# EAGLE board ODGIRON_steel_0412 (EAGLE 9.6.0), part 1 of 2
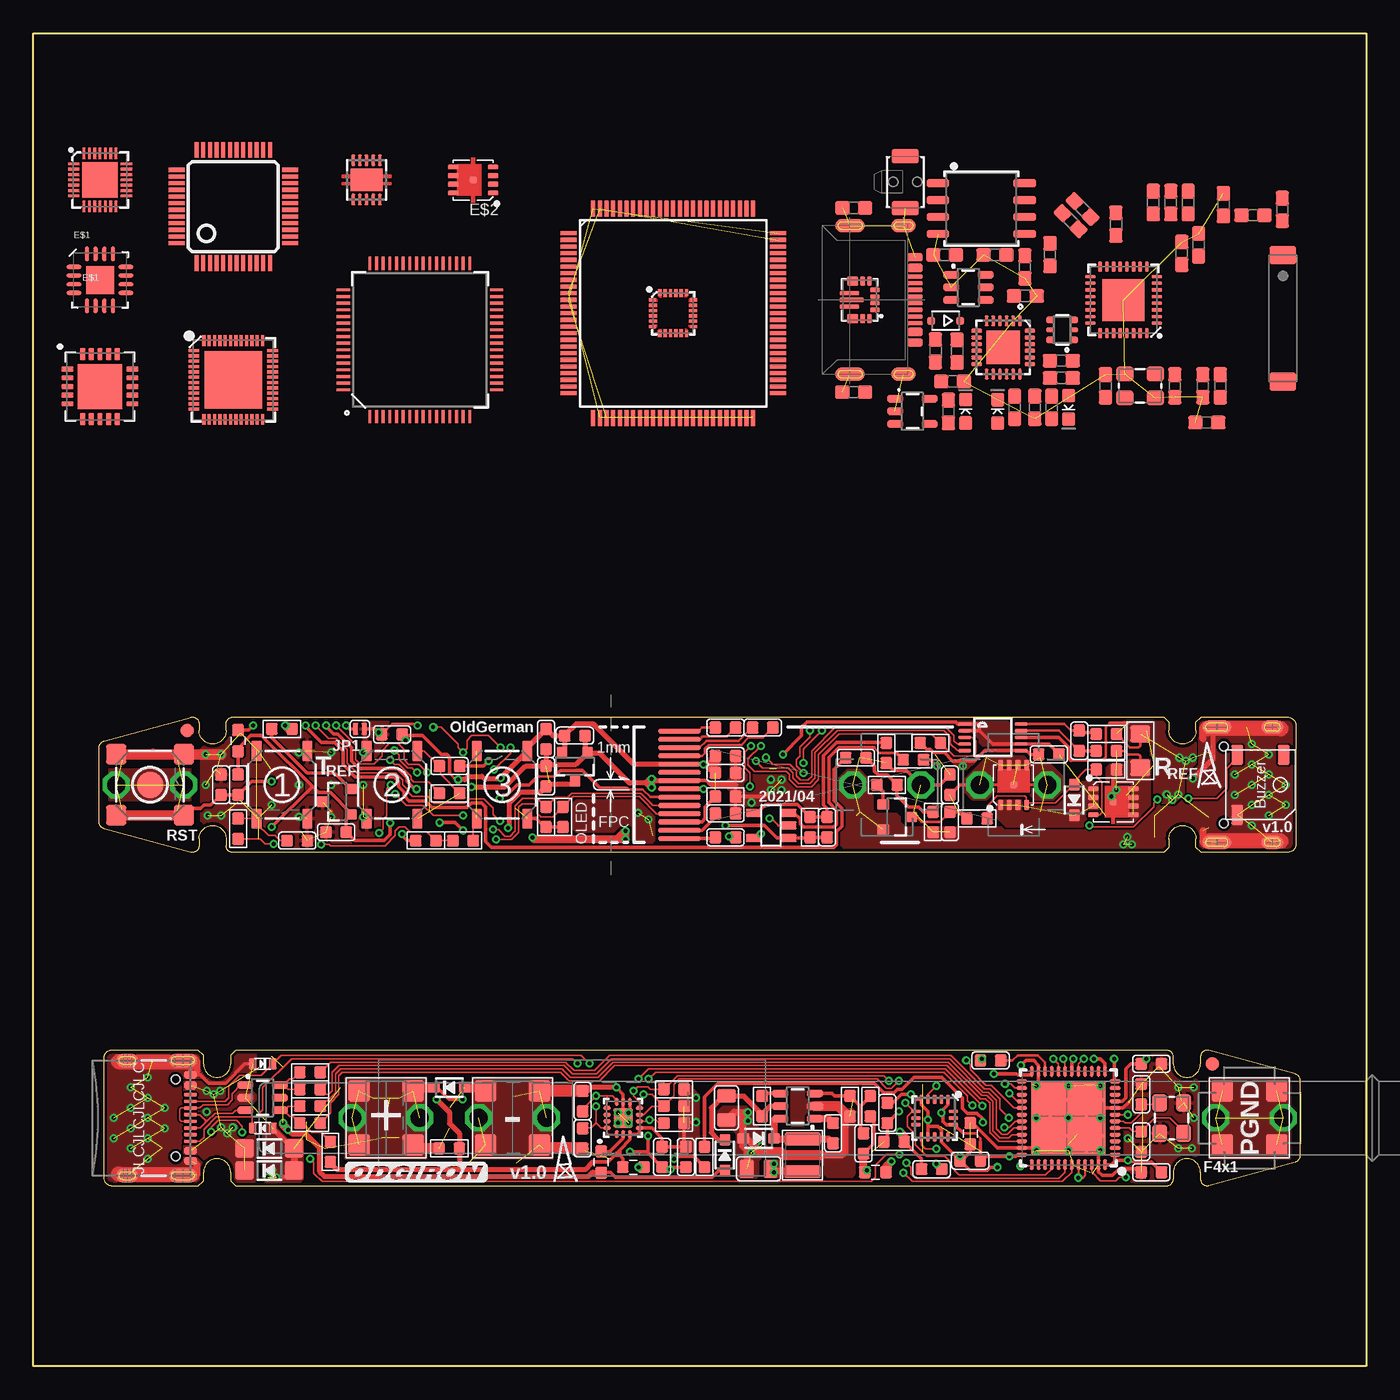
[diagram p0: board, top side]
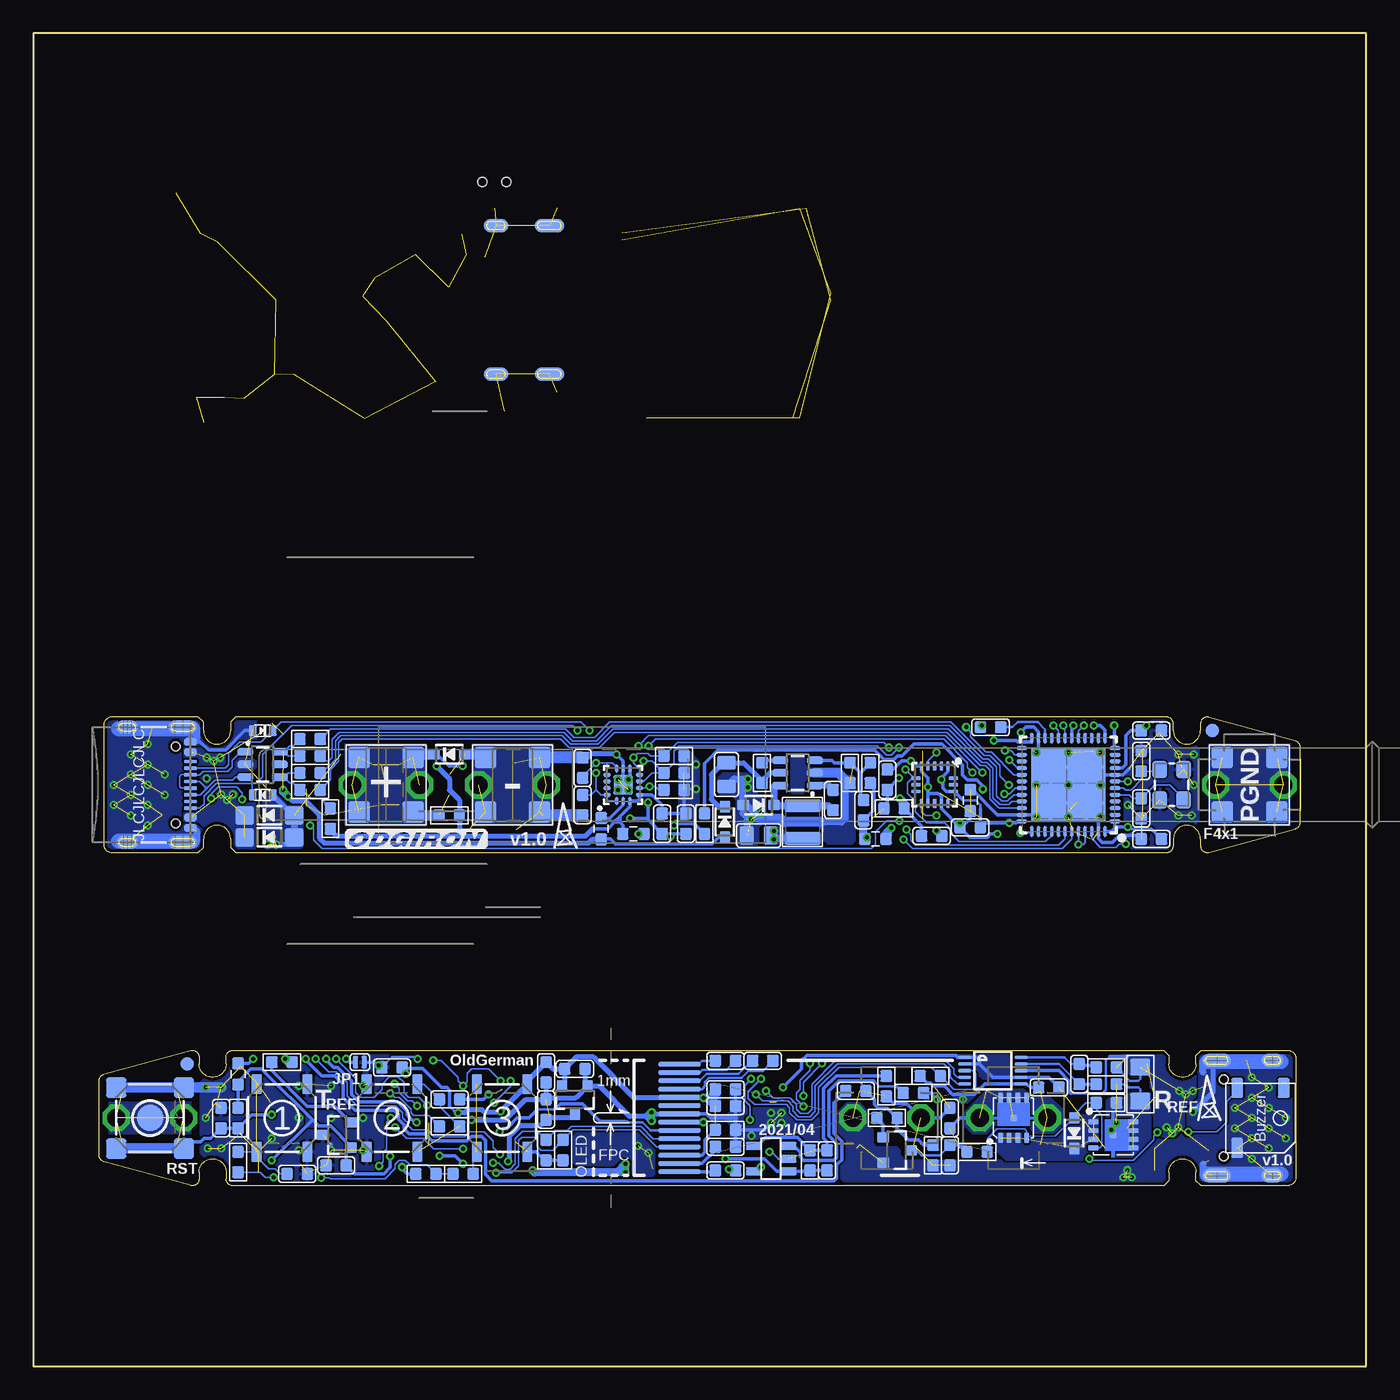
[diagram p1: board, bottom side, seen from below]

Size 100 x 100 mm. Coordinates in mm from the lower left corner, seen from the top.
Outline: 100,0 0,0 0,100 100,100 100,0
Outline: 14.79,23.32 14.79,22.68 arc-180 12.76,22.68 12.76,23.32 12.38,23.7 5.91,23.7 arc90 5.27,23.07 5.27,14.18 arc90 5.91,13.54 12.38,13.54 12.76,13.92 12.76,14.56 arc-180 14.79,14.56 14.79,13.92 15.18,13.54 85.03,13.54 arc90 85.53,14.05 85.53,14.56 arc-180 87.57,14.56 87.57,14.05 arc105 88.21,13.56 94.68,15.32 arc75 95.06,15.83 95.06,21.41 arc75 94.68,21.92 88.21,23.68 arc105 87.57,23.19 87.57,22.68 arc-180 85.53,22.68 85.53,23.19 arc90 85.03,23.7 15.18,23.7 14.79,23.32
Outline: 85.2,48.32 85.2,47.68 arc180 87.24,47.68 87.24,48.32 87.62,48.7 94.09,48.7 arc-90 94.73,48.06 94.73,39.17 arc-90 94.09,38.54 87.62,38.54 87.24,38.92 87.24,39.56 arc180 85.2,39.56 85.2,38.92 84.82,38.54 14.97,38.54 arc-90 14.47,39.05 14.47,39.56 arc180 12.43,39.56 12.43,39.05 arc-105 11.79,38.56 5.32,40.32 arc-75 4.94,40.83 4.94,46.41 arc-75 5.32,46.92 11.79,48.68 arc-105 12.43,48.19 12.43,47.68 arc180 14.47,47.68 14.47,48.19 arc-90 14.97,48.7 84.82,48.7 85.2,48.32
Copper layers (1*16): Top 0.035mm / dielectric 1.5mm / Bottom 0.035mm
Design rules "default *": minimum track width 5mil, minimum drill 0.3mm, track to track 5mil, track to pad 6mil, pad to pad 6mil, via to via 6mil, smd to smd 5mil, copper to edge 10mil, drill to drill 10mil, minimum pad ring 10mil, minimum via ring 6mil, stop-mask expansion 1mil, vias tented up to drill 20mil, thermal gap 8mil
tRestrict: 12 lines
bRestrict: 12 lines

## Footprints (pad centres in the part's own frame; a part is rotated, then mirrored left to right if it is on the bottom)
SOT23-5 = smd 0.6 x 1.2: 1 -0.95,-1.306; 2 0,-1.306; 3 0.95,-1.306; 4 0.95,1.306; 5 -0.95,1.306
BUZZER_5020 = smd 1.5 x 0.9: + -2.25,-1.75; - 2.25,-1.75; NC -2.25,1.75
C0603 = smd 0.889 x 0.889: 1 -0.762,0; 2 0.762,0
C0805 = smd 1.016 x 1.397: 1 -0.889,0; 2 0.889,0
0603 = smd 1.1 x 1: 1 -0.85,0; 2 0.85,0
FUSE_CLIPS_01 = drill 1.35 pad 2 octagon: 1A -2.54,0; 1B 2.54,0
SOD-323 = smd 0.9 x 0.8: A 1.15,0; C -1.15,0
SOD-123 = smd 1.4 x 1.4: A 1.85,0; C -1.85,0
SOD-523 = smd 0.8 x 0.6: A 0,-0.75; K 0,0.75
LED-0603 = smd 1 x 1: A -0.877,0; C 0.877,0
SOD323-R = smd 0.6 x 0.6: A 1.1,0; C -1.1,0
MSOP10 = smd 0.25 x 1: 1 -1,-2.113; 2 -0.5,-2.113; 3 0,-2.113; 4 0.5,-2.113; 5 1,-2.113; 6 1,2.113; 7 0.5,2.113; 8 0,2.113; 9 -0.5,2.113; 10 -1,2.113
HVQFN16_4X4_0.65MM = smd 1.1 x 0.3: 1 -1.95,0.975; 2 -1.95,0.325; 3 -1.95,-0.325; 4 -1.95,-0.975; 9 1.95,-0.975; 10 1.95,-0.325; 11 1.95,0.325; 12 1.95,0.975 | smd 0.3 x 1.1: 5 -0.975,-1.95; 6 -0.325,-1.95; 7 0.325,-1.95; 8 0.975,-1.95; 13 0.975,1.95; 14 0.325,1.95; 15 -0.325,1.95; 16 -0.975,1.95 | smd 2.1 x 2.1: PAD 0,0
DFN8P-0.65-3X3X0.8MM = smd 0.8 x 0.4: 1 -1.5,0.975; 2 -1.5,0.325; 3 -1.5,-0.325; 4 -1.5,-0.975; 5 1.5,-0.975; 6 1.5,-0.325; 7 1.5,0.325; 8 1.5,0.975 | smd 0.508 x 0.508: 9 0,0
F0603 = smd 0.889 x 0.889: 1 -0.8,0; 2 0.8,0
FIDUCIAL_1MM = smd 1 x 1: 1 0,0
DRC-S-PVSON-N10 = smd 0.28 x 0.85: 1 -1,-1.475; 2 -0.5,-1.475; 3 0,-1.475; 4 0.5,-1.475; 5 1,-1.475; 6 1,1.475; 7 0.5,1.475; 8 0,1.475; 9 -0.5,1.475; 10 -1,1.475 | smd 2.4 x 1.65: TH 0,0
LQFP100_14X14 = smd 1.2 x 0.3: 1 -7.85,6; 2 -7.85,5.5; 3 -7.85,5; 4 -7.85,4.5; 5 -7.85,4; 6 -7.85,3.5; 7 -7.85,3; 8 -7.85,2.5; 9 -7.85,2; 10 -7.85,1.5; 11 -7.85,1; 12 -7.85,0.5; 13 -7.85,0; 14 -7.85,-0.5; 15 -7.85,-1; 16 -7.85,-1.5; 17 -7.85,-2; 18 -7.85,-2.5; 19 -7.85,-3; 20 -7.85,-3.5; 21 -7.85,-4; 22 -7.85,-4.5; 23 -7.85,-5; 24 -7.85,-5.5; 25 -7.85,-6; 51 7.85,-6; 52 7.85,-5.5; 53 7.85,-5; 54 7.85,-4.5; 55 7.85,-4; 56 7.85,-3.5; 57 7.85,-3; 58 7.85,-2.5; 59 7.85,-2; 60 7.85,-1.5; 61 7.85,-1; 62 7.85,-0.5; 63 7.85,0; 64 7.85,0.5; 65 7.85,1; 66 7.85,1.5; 67 7.85,2; 68 7.85,2.5; 69 7.85,3; 70 7.85,3.5; 71 7.85,4; 72 7.85,4.5; 73 7.85,5; 74 7.85,5.5; 75 7.85,6 | smd 0.3 x 1.2: 26 -6,-7.85; 27 -5.5,-7.85; 28 -5,-7.85; 29 -4.5,-7.85; 30 -4,-7.85; 31 -3.5,-7.85; 32 -3,-7.85; 33 -2.5,-7.85; 34 -2,-7.85; 35 -1.5,-7.85; 36 -1,-7.85; 37 -0.5,-7.85; 38 0,-7.85; 39 0.5,-7.85; 40 1,-7.85; 41 1.5,-7.85; 42 2,-7.85; 43 2.5,-7.85; 44 3,-7.85; 45 3.5,-7.85; 46 4,-7.85; 47 4.5,-7.85; 48 5,-7.85; 49 5.5,-7.85; 50 6,-7.85; 76 6,7.85; 77 5.5,7.85; 78 5,7.85; 79 4.5,7.85; 80 4,7.85; 81 3.5,7.85; 82 3,7.85; 83 2.5,7.85; 84 2,7.85; 85 1.5,7.85; 86 1,7.85; 87 0.5,7.85; 88 0,7.85; 89 -0.5,7.85; 90 -1,7.85; 91 -1.5,7.85; 92 -2,7.85; 93 -2.5,7.85; 94 -3,7.85; 95 -3.5,7.85; 96 -4,7.85; 97 -4.5,7.85; 98 -5,7.85; 99 -5.5,7.85; 100 -6,7.85
USB-C-16P = smd 0.28 x 1: A5 -1.25,-0.34; A6 -0.25,-0.34; A7 0.25,-0.34; A8 1.25,-0.34; B5 1.75,-0.34; B6 0.75,-0.34; B7 -0.75,-0.34; B8 -1.75,-0.34 | smd 0.56 x 1: GND -3.225,-0.34; GND2 3.225,-0.34; VBUS1 -2.45,-0.34; VBUS2 2.45,-0.34 | smd 1 x 2.1: SHLD1 -4.32,-0.915; SHLD2 4.32,-0.915 | smd 1 x 2.1 bottom: SHLD3 -4.32,-0.915; SHLD4 4.32,-0.915 | smd 1 x 1.6: SHLD5 -4.32,-5.095; SHLD8 4.32,-5.095 | smd 1 x 1.6 bottom: SHLD6 -4.32,-5.095; SHLD7 4.32,-5.095 | hole 0.65: -2.89,-1.445; 2.89,-1.445
SMT-JUMPER_2_NO_SILK = smd 0.406 x 0.889: 1 -0.33,0; 2 0.33,0
SMD,3.2X2.5X2.5MM = smd 0.95 x 2.7: 1 1.225,0; 2 -1.225,0
0.87INCH_128X32_OLED_SSD1306 = smd 3.2 x 0.35: 1 -2.888,-4.03; 2 -2.888,-3.41; 3 -2.888,-2.79; 4 -2.888,-2.17; 5 -2.888,-1.55; 6 -2.888,-0.93; 7 -2.888,-0.31; 8 -2.888,0.31; 9 -2.888,0.93; 10 -2.888,1.55; 11 -2.888,2.17; 12 -2.888,2.79; 13 -2.888,3.41; 14 -2.888,4.03
TP16SQ = smd 1.6 x 1.6: TP 0,0
SOT23-3 = smd 0.8 x 0.9: 1 -0.95,-1; 2 0.95,-1; 3 0,1.1
R0603 = smd 0.889 x 0.889: 1 -0.762,0; 2 0.762,0
R1206 = smd 1.27 x 1.524: 1 -1.27,0; 2 1.27,0
TACTILE_SWITCH_SMD = smd 1.524 x 0.762: 1 -2.54,1.905; 2 2.54,1.905; 3 -2.54,-1.905; 4 2.54,-1.905
TACTILE_SWITCH_SMD' = smd 1.524 x 1.524: 1 -2.54,2.286; 2 2.54,2.286; 3 -2.54,-2.286; 4 2.54,-2.286
TACTILE_SWITCH_SMD_RIGHT_ANGLE = smd 1.1 x 2: 1 -1.95,0; 2 1.95,0 | hole 0.7: 0,0.9; 0,-0.9
HAKKO_T12_K-TYPE_WITH_FUSE_CLIPS_X2 = drill 1.35 pad 2 octagon: 1A 6.96,0; 1A1 16.46,0; 1B 12.04,0; 1B1 21.54,0
TESTPOINT_ROUND_2MM = smd 2 x 2: P$1 0,0
QFN14-2.5X2.5MM = smd 0.58 x 0.3: 1 -1.215,0.5; 2 -1.215,0; 3 -1.215,-0.5; 8 1.215,-0.5; 9 1.215,0; 10 1.215,0.5 | smd 0.3 x 0.58: 4 -0.75,-1.215; 5 -0.25,-1.215; 6 0.25,-1.215; 7 0.75,-1.215; 11 0.75,1.215; 12 0.25,1.215; 13 -0.25,1.215; 14 -0.75,1.215 | smd 1.45 x 1.45: THERMAL 0,0
QFN-28 = smd 0.85 x 0.2: 1 -1.975,1.2; 2 -1.975,0.8; 3 -1.975,0.4; 4 -1.975,0; 5 -1.975,-0.4; 6 -1.975,-0.8; 7 -1.975,-1.2; 15 1.975,-1.2; 16 1.975,-0.8; 17 1.975,-0.4; 18 1.975,0; 19 1.975,0.4; 20 1.975,0.8; 21 1.975,1.2 | smd 0.2 x 0.85: 8 -1.2,-1.975; 9 -0.8,-1.975; 10 -0.4,-1.975; 11 0,-1.975; 12 0.4,-1.975; 13 0.8,-1.975; 14 1.2,-1.975; 22 1.2,1.975; 23 0.8,1.975; 24 0.4,1.975; 25 0,1.975; 26 -0.4,1.975; 27 -0.8,1.975; 28 -1.2,1.975 | smd 2.65 x 2.65: 29 0,0
QFN48_7X7MM_0.5MM = smd 0.8 x 0.3: 1 -3.5,2.75; 2 -3.5,2.25; 3 -3.5,1.75; 4 -3.5,1.25; 5 -3.5,0.75; 6 -3.5,0.25; 7 -3.5,-0.25; 8 -3.5,-0.75; 9 -3.5,-1.25; 10 -3.5,-1.75; 11 -3.5,-2.25; 12 -3.5,-2.75; 25 3.5,-2.75; 26 3.5,-2.25; 27 3.5,-1.75; 28 3.5,-1.25; 29 3.5,-0.75; 30 3.5,-0.25; 31 3.5,0.25; 32 3.5,0.75; 33 3.5,1.25; 34 3.5,1.75; 35 3.5,2.25; 36 3.5,2.75 | smd 0.3 x 0.8: 13 -2.75,-3.5; 14 -2.25,-3.5; 15 -1.75,-3.5; 16 -1.25,-3.5; 17 -0.75,-3.5; 18 -0.25,-3.5; 19 0.25,-3.5; 20 0.75,-3.5; 21 1.25,-3.5; 22 1.75,-3.5; 23 2.25,-3.5; 24 2.75,-3.5; 37 2.75,3.5; 38 2.25,3.5; 39 1.75,3.5; 40 1.25,3.5; 41 0.75,3.5; 42 0.25,3.5; 43 -0.25,3.5; 44 -0.75,3.5; 45 -1.25,3.5; 46 -1.75,3.5; 47 -2.25,3.5; 48 -2.75,3.5 | smd 5.6 x 5.6: P$1 0,0
SOT23-6 = smd 0.55 x 1.2: 1 0.95,1.3; 2 0,1.3; 3 -0.95,1.3; 4 -0.95,-1.3; 5 0,-1.3; 6 0.95,-1.3
SOT23-3@1 = smd 0.8 x 0.9: 1 -0.95,-1; 2 0.95,-1; 3 0,1.1
QFN48-0.4MM = smd 0.8 x 0.23: 1 -2.95,2.2; 2 -2.95,1.8; 3 -2.95,1.4; 4 -2.95,1; 5 -2.95,0.6; 6 -2.95,0.2; 7 -2.95,-0.2; 8 -2.95,-0.6; 9 -2.95,-1; 10 -2.95,-1.4; 11 -2.95,-1.8; 12 -2.95,-2.2; 25 2.95,-2.2; 26 2.95,-1.8; 27 2.95,-1.4; 28 2.95,-1; 29 2.95,-0.6; 30 2.95,-0.2; 31 2.95,0.2; 32 2.95,0.6; 33 2.95,1; 34 2.95,1.4; 35 2.95,1.8; 36 2.95,2.2 | smd 0.23 x 0.8: 13 -2.2,-2.95; 14 -1.8,-2.95; 15 -1.4,-2.95; 16 -1,-2.95; 17 -0.6,-2.95; 18 -0.2,-2.95; 19 0.2,-2.95; 20 0.6,-2.95; 21 1,-2.95; 22 1.4,-2.95; 23 1.8,-2.95; 24 2.2,-2.95; 37 2.2,2.95; 38 1.8,2.95; 39 1.4,2.95; 40 1,2.95; 41 0.6,2.95; 42 0.2,2.95; 43 -0.2,2.95; 44 -0.6,2.95; 45 -1,2.95; 46 -1.4,2.95; 47 -1.8,2.95; 48 -2.2,2.95 | smd 4.3 x 4.3: EP 0,0
LGA-16-3X3 = smd 0.7 x 0.28: 1 -1.4,1; 2 -1.4,0.5; 3 -1.4,0; 4 -1.4,-0.5; 5 -1.4,-1; 9 1.4,-1; 10 1.4,-0.5; 11 1.4,0; 12 1.4,0.5; 13 1.4,1 | smd 0.28 x 0.7: 6 -0.5,-1.4; 7 0,-1.4; 8 0.5,-1.4; 14 0.5,1.4; 15 0,1.4; 16 -0.5,1.4
VQFN-15-HR(3X2.5) = smd 0.7 x 0.35: P$1 -1.15,0.75; P$2 -1.15,0.25; P$3 -1.15,-0.25; P$4 -1.15,-0.75 | smd 0.35 x 0.7: P$5 -0.725,-1.4; P$6 -0.225,-1.4; P$14 -0.225,1.4; P$15 -0.725,1.4 | smd 0.85 x 0.7: P$7/8 0.525,-1.4; P$12/13 0.525,1.4 | smd 1.45 x 0.35: P$9 0.775,-0.5; P$11 0.775,0.5 | smd 1.8 x 0.35: P$10 0.6,0
VQFN20_5MM = smd 0.925 x 0.4: 1 -2.438,1.3; 2 -2.438,0.65; 3 -2.438,0; 4 -2.438,-0.65; 5 -2.438,-1.3; 11 2.438,-1.3; 12 2.438,-0.65; 13 2.438,0; 14 2.438,0.65; 15 2.438,1.3 | smd 0.4 x 0.925: 6 -1.3,-2.438; 7 -0.65,-2.438; 8 0,-2.438; 9 0.65,-2.438; 10 1.3,-2.438; 16 1.3,2.438; 17 0.65,2.438; 18 0,2.438; 19 -0.65,2.438; 20 -1.3,2.438 | smd 3.35 x 3.35: THRM 0,0
QFN24-3X3 = smd 0.495 x 0.25: 1 -1.552,1; 6 -1.552,-1; 13 1.552,-1; 18 1.552,1 | smd 0.6 x 0.25: 2 -1.5,0.6; 3 -1.5,0.2; 4 -1.5,-0.2; 5 -1.5,-0.6; 14 1.5,-0.6; 15 1.5,-0.2; 16 1.5,0.2; 17 1.5,0.6 | smd 0.25 x 0.495: 7 -1,-1.552; 12 1,-1.552; 19 1,1.552; 24 -1,1.552 | smd 0.25 x 0.6: 8 -0.6,-1.5; 9 -0.2,-1.5; 10 0.2,-1.5; 11 0.6,-1.5; 20 0.6,1.5; 21 0.2,1.5; 22 -0.2,1.5; 23 -0.6,1.5
QFN32-5X5MM = smd 0.8 x 0.285: 1 -2.5,1.75; 2 -2.5,1.25; 3 -2.5,0.75; 4 -2.5,0.25; 5 -2.5,-0.25; 6 -2.5,-0.75; 7 -2.5,-1.25; 8 -2.5,-1.75; 17 2.5,-1.75; 18 2.5,-1.25; 19 2.5,-0.75; 20 2.5,-0.25; 21 2.5,0.25; 22 2.5,0.75; 23 2.5,1.25; 24 2.5,1.75 | smd 0.285 x 0.8: 9 -1.75,-2.5; 10 -1.25,-2.5; 11 -0.75,-2.5; 12 -0.25,-2.5; 13 0.25,-2.5; 14 0.75,-2.5; 15 1.25,-2.5; 16 1.75,-2.5; 25 1.75,2.5; 26 1.25,2.5; 27 0.75,2.5; 28 0.25,2.5; 29 -0.25,2.5; 30 -0.75,2.5; 31 -1.25,2.5; 32 -1.75,2.5 | smd 3.15 x 3.15: GND 0,0
SOIC-8 = smd 0.61 x 1.702: 1 -1.905,-3.251; 2 -0.635,-3.251; 3 0.635,-3.251; 4 1.905,-3.251; 5 1.905,3.251; 6 0.635,3.251; 7 -0.635,3.251; 8 -1.905,3.251
QFN24_4MM_SMSC = smd 0.8 x 0.28: 1 -2,1.25; 2 -2,0.75; 3 -2,0.25; 4 -2,-0.25; 5 -2,-0.75; 6 -2,-1.25; 13 2,-1.25; 14 2,-0.75; 15 2,-0.25; 16 2,0.25; 17 2,0.75; 18 2,1.25 | smd 0.28 x 0.8: 7 -1.25,-2; 8 -0.75,-2; 9 -0.25,-2; 10 0.25,-2; 11 0.75,-2; 12 1.25,-2; 19 1.25,2; 20 0.75,2; 21 0.25,2; 22 -0.25,2; 23 -0.75,2; 24 -1.25,2 | smd 2.5 x 2.5: THERM 0,0
LQFP48 = smd 0.3 x 1.2: 1 -2.75,-4.25; 2 -2.25,-4.25; 3 -1.75,-4.25; 4 -1.25,-4.25; 5 -0.75,-4.25; 6 -0.25,-4.25; 7 0.25,-4.25; 8 0.75,-4.25; 9 1.25,-4.25; 10 1.75,-4.25; 11 2.25,-4.25; 12 2.75,-4.25; 25 2.75,4.25; 26 2.25,4.25; 27 1.75,4.25; 28 1.25,4.25; 29 0.75,4.25; 30 0.25,4.25; 31 -0.25,4.25; 32 -0.75,4.25; 33 -1.25,4.25; 34 -1.75,4.25; 35 -2.25,4.25; 36 -2.75,4.25 | smd 1.2 x 0.3: 13 4.25,-2.75; 14 4.25,-2.25; 15 4.25,-1.75; 16 4.25,-1.25; 17 4.25,-0.75; 18 4.25,-0.25; 19 4.25,0.25; 20 4.25,0.75; 21 4.25,1.25; 22 4.25,1.75; 23 4.25,2.25; 24 4.25,2.75; 37 -4.25,2.75; 38 -4.25,2.25; 39 -4.25,1.75; 40 -4.25,1.25; 41 -4.25,0.75; 42 -4.25,0.25; 43 -4.25,-0.25; 44 -4.25,-0.75; 45 -4.25,-1.25; 46 -4.25,-1.75; 47 -4.25,-2.25; 48 -4.25,-2.75
TQFP64 = smd 0.22 x 1: 1 -3.75,-5.75; 2 -3.25,-5.75; 3 -2.75,-5.75; 4 -2.25,-5.75; 5 -1.75,-5.75; 6 -1.25,-5.75; 7 -0.75,-5.75; 8 -0.25,-5.75; 9 0.25,-5.75; 10 0.75,-5.75; 11 1.25,-5.75; 12 1.75,-5.75; 13 2.25,-5.75; 14 2.75,-5.75; 15 3.25,-5.75; 16 3.75,-5.75; 33 3.75,5.75; 34 3.25,5.75; 35 2.75,5.75; 36 2.25,5.75; 37 1.75,5.75; 38 1.25,5.75; 39 0.75,5.75; 40 0.25,5.75; 41 -0.25,5.75; 42 -0.75,5.75; 43 -1.25,5.75; 44 -1.75,5.75; 45 -2.25,5.75; 46 -2.75,5.75; 47 -3.25,5.75; 48 -3.75,5.75 | smd 1 x 0.22: 17 5.75,-3.75; 18 5.75,-3.25; 19 5.75,-2.75; 20 5.75,-2.25; 21 5.75,-1.75; 22 5.75,-1.25; 23 5.75,-0.75; 24 5.75,-0.25; 25 5.75,0.25; 26 5.75,0.75; 27 5.75,1.25; 28 5.75,1.75; 29 5.75,2.25; 30 5.75,2.75; 31 5.75,3.25; 32 5.75,3.75; 49 -5.75,3.75; 50 -5.75,3.25; 51 -5.75,2.75; 52 -5.75,2.25; 53 -5.75,1.75; 54 -5.75,1.25; 55 -5.75,0.75; 56 -5.75,0.25; 57 -5.75,-0.25; 58 -5.75,-0.75; 59 -5.75,-1.25; 60 -5.75,-1.75; 61 -5.75,-2.25; 62 -5.75,-2.75; 63 -5.75,-3.25; 64 -5.75,-3.75
SOT23-5' = smd 0.55 x 1.2: 1 -0.95,-1.3; 2 0,-1.3; 3 0.95,-1.3; 4 0.95,1.3; 5 -0.95,1.3
SOT363 = smd 0.5 x 0.584: 1 -0.75,-0.9; 3 0.75,-0.9; 4 0.75,0.9; 6 -0.75,0.9 | smd 0.4 x 0.584: 2 0,-0.9; 5 0,0.9
3.2X2.5_KX-7 = smd 1.3 x 1.1: 1 -1.15,-0.9; 2 1.15,-0.9; 3 1.15,0.9; 4 -1.15,0.9
AN9520 = smd 1.4 x 2: 1 -4.75,0; 2 4.75,0
USB-C_BLOW_BOARD = smd 0.3 x 1.15: A5 -1.25,0.865; A6:D+ -0.25,0.865; A7:D- 0.25,0.865; A8 1.25,0.865; B5 1.75,0.865; B6:D+ 0.75,0.865; B7:D- -0.75,0.865; B8 -1.75,0.865 | smd 0.6 x 1.15: GND1 -3.2,0.865; GND2 3.2,0.865; VBUS1 -2.4,0.865; VBUS2 2.4,0.865 | smd 1 x 1.8: SHLD1 -5.575,0; SHLD4 5.575,0 | smd 1 x 2.2: SHLD2 -5.575,-4; SHLD3 5.575,-4 | smd 1 x 1.8 bottom: SHLD5 -5.575,0; SHLD7 5.575,0 | smd 1 x 2.2 bottom: SHLD6 -5.575,-4; SHLD8 5.575,-4

## Placement (x,y rotation side)
AMP1  SGM8551XN5G/TR  [SOT23-5]  44.64,15.57 90 bottom
AMP2  SGM8551XN5G/TR  [SOT23-5]  55.36,40.57 90 top
BUZ1  [BUZZER_5020]  7.94,18.62 270 bottom
BUZ2  [BUZZER_5020]  92.06,43.62 270 top
C1  0.1uF/50V  [C0603]  21.53,21.92 270 bottom
C2  0.1uF/50V  [C0603]  47.18,15.7 270 top
C3  0.1uF/50V  [C0603]  80.2,14.43 0 bottom
C4  0.1uF/50V  [C0603]  23.81,20.91 0 bottom
C5  0.1uF/50V  [C0603]  77.28,15.06 180 bottom
C6  0.1uF/50V  [C0603]  68.77,20.02 0 bottom
C7  4.7uF/16V  [C0603]  67.4,14.78 0 top
C8  10pF/50V  [C0603]  83.12,16.84 90 top
C9  10pF/50V  [C0603]  83.12,20.4 270 top
C10  0.1uF/50V  [C0603]  85.92,18.62 90 bottom
C11  0.1uF/50V  [C0603]  83.88,22.68 180 top
C12  0.1uF/50V  [C0603]  73.09,22.4 0 bottom
C13  0.1uF/50V  [C0603]  70.29,15.42 0 top
C14  0.1uF/50V  [C0603]  83.88,14.56 0 top
C15  1uF/16V  [C0603]  48.96,15.7 270 top
C16  0.1uF/50V  [C0603]  31.23,15.83 90 bottom
C17  10nF/50V  [C0603]  38.29,20.65 180 bottom
C18  470pF/50V  [C0603]  41.21,17.1 270 top
C19  470pF/50V  [C0603]  41.21,19.89 90 top
C20  10uF/10V  [C0603]  64.07,19 270 top
C21  1uF/16V  [C0603]  48.07,22.91 0 bottom
C22  1uF/16V  [C0603]  45.27,22.91 0 bottom
C23  4.7uF/16V  [C0603]  48.07,20.78 180 bottom
C24  1uF/16V  [C0603]  48.07,19.51 180 bottom
C25  10uF/10V  [C0603]  48.07,16.46 0 bottom
C26  10uF/10V  [C0603]  48.07,14.68 0 bottom
C27  10nF/50V  [C0603]  31.23,18.62 90 bottom
C28  10pF/50V  [C0603]  16.88,45.4 270 bottom
C29  0.1uF/50V  [C0603]  60.01,17.48 270 top
C30  10uF/25V  [C0805]  54.42,14.81 180 top
C31  1uF/16V  [C0603]  61.53,19.26 270 bottom
C32  2.2uF/16V  [C0603]  71.82,22.94 180 top
C33  4.7uF/50V  [C0805]  52.01,19.38 270 top
C34  100pF/50V  [C0603]  40.45,15.45 90 bottom
C35  100pF/50V  [C0603]  62.29,16.71 90 top
C36  10pF/50V  [C0603]  16.88,41.84 90 bottom
C37  10uF/10V  [C0603]  61.53,22.05 90 bottom
C38  0.1uF/50V  [C0603]  16.12,47.68 180 bottom
C39  1uF/16V  [C0603]  59.37,22.3 180 bottom
C40  0.1uF/50V  [C0603]  26.91,47.4 0 top
C41  0.1uF/50V  [C0603]  29.71,40.42 0 bottom
C42  0.1uF/50V  [C0603]  16.12,39.56 0 bottom
C43  0.1uF/50V  [C0603]  52.82,40.7 270 bottom
C44  1uF/16V  [C0603]  51.04,40.7 270 bottom
C45  470pF/50V  [C0603]  58.79,42.1 270 bottom
C46  470pF/50V  [C0603]  58.79,44.89 90 bottom
C47  1uF/16V  [C0603]  51.93,47.91 0 top
C48  1uF/16V  [C0603]  54.73,47.91 0 top
C49  4.7uF/16V  [C0603]  51.93,45.78 180 top
C50  1uF/16V  [C0603]  51.93,44.51 180 top
C51  4.7uF/50V  [C0805]  47.99,44.38 270 bottom
C52  0.1uF/50V  [C0603]  78.47,46.92 270 top
C53  0.1uF/50V  [C0603]  76.19,45.91 0 top
C54  0.1uF/50V  [C0603]  22.72,40.06 180 top
C55  10nF/50V  [C0603]  68.77,43.62 90 top
C56  100pF/50V  [C0603]  59.55,40.45 90 top
C57  10uF/25V  [C0805]  45.58,39.81 180 bottom
C58  0.1uF/50V  [C0603]  19.8,39.43 0 top
C59  0.1uF/50V  [C0603]  68.77,40.83 90 top
C60  10nF/50V  [C0603]  61.71,45.65 180 top
C61  0.1uF/50V  [C0603]  39.99,42.48 270 bottom
C62  10uF/10V  [C0603]  51.93,41.46 0 top
C63  10uF/10V  [C0603]  51.93,39.68 0 top
C64  1uF/16V  [C0603]  38.47,44.26 270 top
C65  10uF/10V  [C0603]  38.47,47.05 90 top
C66  1uF/16V  [C0603]  40.63,47.3 180 top
C67  10uF/10V  [C0603]  35.93,44 270 bottom
C68  0.1uF/50V  [C0603]  31.23,45.02 0 top
C69  4.7uF/16V  [C0603]  32.6,39.78 0 bottom
C70  0.1uF/50V  [C0603]  14.09,43.62 90 top
C71  2.2uF/16V  [C0603]  28.18,47.94 180 bottom
C72  100pF/50V  [C0603]  37.71,41.72 90 bottom
C108  1uF/X7R  [0603]  68.97,73.88 0 top
C109  5.6pF  [0603]  91.5,86.35 0 top
C110  10pF  [0603]  80.44,73.55 270 top
C111  100nF  [0603]  88.04,70.81 180 top
C112  100nF  [0603]  61.55,86.9 0 top
C113  1uF/X7R  [0603]  61.56,73.09 180 top
C114  4.7uF  [0603]  74.39,82.47 270 top
C115  100nF  [0603]  72.15,83.38 180 top
C116  10pF  [0603]  85.64,73.55 90 top
C117  4.7uF  [0603]  75.14,71.94 270 top
C118  100nF  [0603]  86.16,83.49 90 top
C119  1uF  [0603]  68.37,83.38 180 top
C120  10uF  [0603]  87.43,84.13 90 top
C156  100nF  [0603]  74.43,80.29 0 top
CP1  [FUSE_CLIPS_01]  91.25,18.62 0 top
CP2  [FUSE_CLIPS_01]  8.75,43.62 0 bottom
D1  B5819WS  [SOD-323]  51.88,15.83 270 top
D2  SMF24A  [SOD-123]  17.72,14.68 0 top
D3  MMSZ5242BS-7-F  [SOD-323]  21.91,17.48 90 bottom
D4  B5819WS  [SOD-323]  45.58,42.1 180 bottom
D5  SMF24A  [SOD-123]  17.72,16.33 0 top
D6  ESD5B5.0ST1  [SOD-523]  17.21,17.86 90 top
D7  B5819WS  [SOD-323]  54.42,17.1 180 top
D8  ESD5B5.0ST1  [SOD-523]  17.21,22.68 270 top
D9  B5819WS  [SOD-323]  31.2,20.91 0 top
D10  MMSZ5242BS-7-F  [SOD-323]  78.09,42.48 90 top
D11  SMF24A  [SOD-123]  82.28,39.68 0 bottom
D12  SMF24A  [SOD-123]  82.28,41.33 0 bottom
D13  ESD5B5.0ST1  [SOD-523]  82.79,42.86 90 bottom
D14  ESD5B5.0ST1  [SOD-523]  82.79,47.68 270 bottom
D15  B5819WS  [SOD-323]  48.12,40.83 270 bottom
D16  B5819WS  [SOD-323]  68.8,45.91 0 bottom
D28  BLUE  [LED-0603]  77.67,71.94 270 top
D29  B5819W  [SOD323-R]  68.45,78.44 180 top
D30  BLUE  [LED-0603]  72.35,71.63 90 top
D31  BLUE  [LED-0603]  69.95,71.64 90 top
DA1  INA226  [MSOP10]  28,22.18 270 bottom
DA2  INA226  [MSOP10]  72,47.18 270 top
E$1  [HVQFN16_4X4_0.65MM]  5,81.5 0 top
E$2  [DFN8P-0.65-3X3X0.8MM]  33,89 180 top
F1  6V 0.5A  [0603]  67.69,76.18 270 top
FB1  1K  [F0603]  63.18,14.56 0 top
FB2  1K  [F0603]  84.64,21.92 270 bottom
FB3  1K  [F0603]  45.02,14.94 180 top
FB4  1K  [F0603]  70.29,17.45 90 top
FB5  1K  [F0603]  42.61,15.32 270 top
FB6  1K  [F0603]  15.36,46.92 270 top
FB7  1K  [F0603]  36.82,39.56 0 bottom
FB8  1K  [F0603]  54.98,39.94 180 bottom
FB9  1K  [F0603]  29.71,42.45 90 bottom
FB10  1K  [F0603]  57.39,40.32 270 bottom
FID1  FIDUCIAL  [FIDUCIAL_1MM]  88.45,22.68 0 top
FID2  FIDUCIAL  [FIDUCIAL_1MM]  88.45,22.68 0 bottom
FID3  FIDUCIAL  [FIDUCIAL_1MM]  11.54,47.68 0 bottom
FID4  FIDUCIAL  [FIDUCIAL_1MM]  11.54,47.68 0 top
IC1  TPS6300  [DRC-S-PVSON-N10]  25,89 0 top
IC2  STM32L151ZE  [LQFP100_14X14]  48,79 0 top
J1  [USB-C-16P]  87.87,43.62 270 bottom
J3  [USB-C-16P]  12.13,18.62 270 top
JP1  [SMT-JUMPER_2_NO_SILK]  75.5,22.81 180 bottom
JP2  [SMT-JUMPER_2_NO_SILK]  24.5,47.81 180 top
L1  33uH CBC3225T330KR  [SMD,3.2X2.5X2.5MM]  57.72,15.83 90 top
L2  33uH CBC3225T330KR  [SMD,3.2X2.5X2.5MM]  42.28,40.83 90 bottom
LCD1  0.87inch SSD1306  [0.87INCH_128X32_OLED_SSD1306]  54.42,18.62 180 bottom
LCD2  0.87inch SSD1306  [0.87INCH_128X32_OLED_SSD1306]  45.58,43.62 180 top
LOGO1  OSHW-LOGONO_SILK  [DUMMY]  4.89,12.4 0 top
LOGO2  OSHW-LOGONO_SILK  [DUMMY]  95.11,37.4 0 bottom
PAD1  PADTP16SQ  [TP16SQ]  24.45,20.65 0 top
PAD2  PADTP16SQ  [TP16SQ]  28.49,20.65 0 top
PAD3  PADTP16SQ  [TP16SQ]  24.45,16.59 0 top
PAD4  PADTP16SQ  [TP16SQ]  28.49,16.59 0 top
PAD5  PADTP16SQ  [TP16SQ]  33.92,20.65 0 top
PAD6  PADTP16SQ  [TP16SQ]  33.92,16.59 0 top
PAD7  PADTP16SQ  [TP16SQ]  37.99,20.65 0 top
PAD8  PADTP16SQ  [TP16SQ]  37.99,16.59 0 top
PAD9  PADTP16SQ  [TP16SQ]  93.28,16.59 0 top
PAD10  PADTP16SQ  [TP16SQ]  89.22,20.65 0 top
PAD11  PADTP16SQ  [TP16SQ]  89.22,16.59 0 top
PAD12  PADTP16SQ  [TP16SQ]  93.28,20.65 0 top
PAD13  PADTP16SQ  [TP16SQ]  75.55,45.65 0 bottom
PAD14  PADTP16SQ  [TP16SQ]  71.51,45.65 0 bottom
PAD15  PADTP16SQ  [TP16SQ]  75.55,41.59 0 bottom
PAD16  PADTP16SQ  [TP16SQ]  71.51,41.59 0 bottom
PAD17  PADTP16SQ  [TP16SQ]  66.08,45.65 0 bottom
PAD18  PADTP16SQ  [TP16SQ]  66.08,41.59 0 bottom
PAD19  PADTP16SQ  [TP16SQ]  62.01,45.65 0 bottom
PAD20  PADTP16SQ  [TP16SQ]  62.01,41.59 0 bottom
PAD21  PADTP16SQ  [TP16SQ]  6.72,41.59 0 bottom
PAD22  PADTP16SQ  [TP16SQ]  10.78,45.65 0 bottom
PAD23  PADTP16SQ  [TP16SQ]  10.78,41.59 0 bottom
PAD24  PADTP16SQ  [TP16SQ]  6.72,45.65 0 bottom
Q1  AON7403  [DFN8P-0.65-3X3X0.8MM]  73.55,43.62 90 top
Q2  AON7403  [DFN8P-0.65-3X3X0.8MM]  18.99,17.35 0 bottom
Q3  AON7403  [DFN8P-0.65-3X3X0.8MM]  26.45,18.62 90 bottom
Q4  S8050  [SOT23-3]  35.24,16.21 270 bottom
Q5  AON7403  [DFN8P-0.65-3X3X0.8MM]  81.01,42.35 0 top
Q6  S8050  [SOT23-3]  64.76,41.21 270 top
R1  32.4K  [R0603]  61.28,19.51 90 top
R2  124K  [R0603]  62.8,19.51 90 top
R3  4.7K  [R0603]  48.07,19.51 180 top
R4  1.5K  [R0603]  22.29,16.08 270 top
R5  22R  [R0603]  20.76,19.51 0 top
R6  22R  [R0603]  20.76,20.78 0 top
R7  1K  [R0603]  67.75,14.43 0 bottom
R8  100K  [R0603]  70.55,14.43 180 bottom
R9  10K  [R0603]  84.64,15.32 90 bottom
R10  4.7K  [R0603]  19.49,19.76 180 bottom
R11  10K  [R0603]  35.95,18.62 0 bottom
R12  1K  [R0603]  32.5,15.83 90 bottom
R13  32.4K  [R0603]  31.2,16.33 0 top
R14  10K  [R0603]  68.77,17.98 0 bottom
R15  1.5K  [R0603]  77.71,41.08 270 bottom
R16  4.7K  [R0603]  48.07,18.24 180 top
R17  560K  [R0603]  48.07,17.73 180 bottom
R18  4.7K  [R0603]  60.26,16.21 270 bottom
R19  4.7K  [R0603]  61.53,16.21 270 bottom
R20  100K  [R0603]  54.67,19.51 270 top
R21  10K  [R0603]  15.36,40.32 90 top
R22  4.7K  [R0603]  64.58,16.84 180 top
R23  1K  [R0603]  84.64,18.62 90 bottom
R24  10mR ±1% ±50ppm/℃  [R1206]  16.95,21.16 90 bottom
R25  4.7K  [R0603]  48.07,20.78 180 top
R26  1K  [R0603]  32.25,39.43 0 top
R27  22R  [R0603]  20.76,18.24 0 top
R28  22R  [R0603]  20.76,22.05 0 top
R29  100K  [R0603]  29.45,39.43 180 top
R30  22R  [R0603]  79.24,44.51 0 bottom
R31  22R  [R0603]  79.24,45.78 0 bottom
R32  4.7K  [R0603]  51.93,45.78 180 bottom
R33  4.7K  [R0603]  51.93,44.51 180 bottom
R34  4.7K  [R0603]  51.93,43.24 180 bottom
R35  4.7K  [R0603]  29.2,16.08 180 bottom
R36  10R  [R0603]  19.49,22.43 0 bottom
R37  10R  [R0603]  19.49,21.16 0 bottom
R38  10K  [R0603]  32.7,21.77 0 bottom
R39  560K  [R0603]  51.93,42.73 180 top
R40  4.7K  [R0603]  39.74,41.21 270 top
R41  1K  [R0603]  81.34,22.81 180 bottom
R42  100K  [R0603]  33.97,20.5 0 bottom
R43  2.37K ±0.1% ±25ppm/℃  [R0603]  36,21.01 270 bottom
R44  750K ±0.1% ±25ppm/℃  [R0603]  41.72,15.45 90 bottom
R45  1K  [R0603]  50.35,15.7 270 top
R46  4.7K  [R0603]  38.47,41.21 270 top
R47  4.7K  [R0603]  35.42,41.84 180 bottom
R48  100K  [R0603]  45.33,44.51 270 bottom
R49  32.4K  [R0603]  38.72,44.51 90 bottom
R50  124K  [R0603]  37.2,44.51 90 bottom
R51  22R  [R0603]  79.24,43.24 0 bottom
R52  22R  [R0603]  79.24,47.05 0 bottom
R53  4.7K  [R0603]  70.8,41.08 180 top
R54  10R  [R0603]  80.51,47.43 0 top
R55  10R  [R0603]  80.51,46.16 0 top
R56  1K  [R0603]  18.66,47.81 180 top
R57  100K  [R0603]  66.03,45.5 0 top
R58  2.37K ±0.1% ±25ppm/℃  [R0603]  64,46.01 270 top
R59  750K ±0.1% ±25ppm/℃  [R0603]  58.28,40.45 90 top
R60  1K  [R0603]  49.65,40.7 270 bottom
R61  10mR ±1% ±50ppm/℃  [R1206]  83.05,46.16 90 top
R62  4.7K  [R0603]  80.51,44.76 180 top
R63  10K  [R0603]  64.05,43.62 0 top
R64  1K  [R0603]  67.5,40.83 90 top
R65  10K  [R0603]  67.3,46.77 0 top
R66  10K  [R0603]  31.23,42.98 0 top
R67  1K  [R0603]  15.36,43.62 90 top
R68  32.4K  [R0603]  68.8,41.33 0 bottom
R100  4k7  [0603]  69.3,76.16 270 top
R101  [0603]  89.29,87.14 270 top
R102  [0603]  93.7,86.79 270 top
R103  100k  [0603]  86.64,87.3 270 top
R104  220k  [0603]  85.34,87.3 90 top
R105  10k  [0603]  81.22,85.68 270 top
R106  10k  [0603]  77.82,85.91 315 top
R107  10k  [0603]  78.72,86.82 315 top
R108  470  [0603]  77.13,75.44 0 top
R109  470  [0603]  77.13,74.14 0 top
R110  1k  [0603]  76.4,71.94 90 top
R111  12k  [0603]  87.75,73.55 90 top
R112  200  [0603]  76.28,83.39 90 top
R113  10k  [0603]  84.02,87.3 90 top
R114  10k  [0603]  89.05,73.55 270 top
R115  1k  [0603]  73.63,71.94 90 top
R116  1k  [0603]  68.65,71.63 270 top
S1  [TACTILE_SWITCH_SMD]  81.34,18.62 270 bottom
S2  [TACTILE_SWITCH_SMD]  73.09,18.62 90 bottom
S3  [TACTILE_SWITCH_SMD]  64.83,18.62 90 bottom
S4  [TACTILE_SWITCH_SMD]  35.17,43.62 90 top
S5  [TACTILE_SWITCH_SMD']  91.25,18.62 0 bottom
S6  [TACTILE_SWITCH_SMD]  18.66,43.62 270 top
S7  [TACTILE_SWITCH_SMD]  26.91,43.62 90 top
S8  [TACTILE_SWITCH_SMD']  8.75,43.62 0 top
S13  SWITCH  [TACTILE_SWITCH_SMD_RIGHT_ANGLE]  65.41,88.84 270 top
T1  [HAKKO_T12_K-TYPE_WITH_FUSE_CLIPS_X2]  16.95,18.62 0 top
T2  [HAKKO_T12_K-TYPE_WITH_FUSE_CLIPS_X2]  83.05,43.62 0 bottom
TP1  PGND  [TESTPOINT_ROUND_2MM]  91.25,18.62 0 bottom
TP2  PGND  [TESTPOINT_ROUND_2MM]  8.75,43.62 0 top
U1  FUSB302BMPX  [QFN14-2.5X2.5MM]  44.26,18.62 90 top
U2  SX1509  [QFN-28]  5,89 0 top
U3  STM32F4x1CxU6  [QFN48_7X7MM_0.5MM]  77.66,18.62 180 top
U4  MP2456GJ  [SOT23-6]  57.34,19.51 270 top
U5  MCP9700AT-E/TT,or LM50CIM3X  [SOT23-3@1]  77.18,17.35 90 bottom
U6  MCP1700T-3302E/TT  [SOT23-3]  59.37,20.02 180 bottom
U7  ESP32  [QFN48-0.4MM]  15,74 0 top
U8  LIS3DH  [LGA-16-3X3]  67.63,18.62 270 top
U9  TPS63070  [VQFN-15-HR(3X2.5)]  62,80 180 top
U10  MCP9601  [VQFN20_5MM]  5,73.5 0 top
U11  9DoF IMU  [QFN24-3X3]  48,79 0 top
U12  STM32F4x1CxU6  [QFN48_7X7MM_0.5MM]  22.34,43.62 180 bottom
U13  FUSB302BMPX  [QFN14-2.5X2.5MM]  55.74,43.62 90 bottom
U14  MP2456GJ  [SOT23-6]  42.66,44.51 270 bottom
U15  MCP9700AT-E/TT,or LM50CIM3X  [SOT23-3@1]  22.82,42.35 90 top
U16  MCP1700T-3302E/TT  [SOT23-3]  40.63,45.02 180 top
U17  LIS3DH  [LGA-16-3X3]  32.37,43.62 270 bottom
U24  ESP8266  [QFN32-5X5MM]  81.8,80 180 top
U25  W25Q32FV  [SOIC-8]  71.12,86.85 270 top
U26  CP2104  [QFN24_4MM_SMSC]  72.77,76.43 270 top
U$1  [LQFP48]  15,87 0 top
U$2  STM32F405RGT6  [TQFP64]  29,77 0 top
U$3  [CREATIVE_COMMONS]  22.48,-0.75 0 top
U$4  [SOT23-5']  65.96,71.64 270 top
U$5  [CREATIVE_COMMONS]  27.48,-2.75 0 top
U$6  U2  [SOT363]  77.19,77.75 90 top
U$7  [3.2X2.5_KX-7]  83.03,73.55 0 top
U$8  [AN9520]  93.75,78.61 270 top
U$9  [CREATIVE_COMMONS]  26.48,3.25 0 top
U$10  [CREATIVE_COMMONS]  27.48,26.25 0 top
U$14  USBLC6-2  [SOT23-6]  70.15,80.94 90 top
USB-C  [USB-C_BLOW_BOARD]  65.29,80 270 top
VD1  USBLC6-2SC6  [SOT23-6]  17.21,20.14 90 top
VD2  USBLC6-2SC6  [SOT23-6]  82.79,45.14 90 bottom
ZO1  8MHz  [3.2X2.5_KX-7]  85.41,18.62 270 top
ZO2  8MHz  [3.2X2.5_KX-7]  14.59,43.62 270 bottom

## Library data of the parts
AMP1 AMP2 = TS100; MPN: OPA340NA/3KG4; OC_FARNELL: 1234805; OC_NEWARK: 13M5177
BUZ1 BUZ2 C1-C72 CP1 CP2 D1-D16 DA1 DA2 E$1 E$2 FB1-FB10 FID1-FID4 JP1 JP2 L1 L2 LCD1 LCD2 PAD1-PAD24 Q1-Q3 Q5 R1-R68 S1-S4 S6 S7 U4-U6 U10 U14-U16 = TS100
C108-C120 C156 = SparkFun-Capacitors
D28 D30 D31 = SparkFun-LED; PROD_ID: DIO-08575
D29 = diode
F1 R100-R116 = SparkFun-Resistors
IC1 = texas; MPN: TPS63000DRCTG4; OC_FARNELL: 1511852; OC_NEWARK: 59M7217
IC2 = stm32xx
J1 J3 = FUSB302; PROD_ID: CONN-14122
LOGO1 LOGO2 U$3 U$5 U$9 U$10 = SparkFun-Aesthetics
Q4 Q6 = SparkFun-DiscreteSemi; PROD_ID: TRANS-08049
S5 S8 = untitled
S13 = SparkFun-Switches; PROD_ID: COMP-12265
T1 T2 = T12_FUSE_CLIPS
TP1 TP2 U$6 = microbuilder
U1 U13 = FUSB302; PROD_ID: IC-12452
U2 = SparkFun-IC-Special-Function; PROD_ID: IC-11311
U3 U12 U$1 = STM32
U7 = SparkFun-RF; PROD_ID: IC-13338
U8 U17 = SparkFun-Sensors; PROD_ID: IC-13419; SF_ID: N/A
U9 = SparkFun-IC-Power; PROD_ID: IC-14258
U11 = SparkFun-Sensors; PROD_ID: IC-14247
U24 = SparkFun-RF; PROD_ID: IC-12452
U25 = SparkFun-IC-Memory; PROD_ID: IC-13229
U26 = microbuilder; SPICEPREFIX: X
U$2 = SparkFun-IC-Microcontroller; PROD_ID: IC-11709
U$4 = SparkFun-IC-Power
U$7 = crystal-geyer_V1_0
U$8 = LAN
U$14 VD1 VD2 = ESD-protection
USB-C = SparkFun-Connectors
ZO1 ZO2 = DIP

## Nets
3.9V: C30.1 C35.1 FB1.1 L1.2 R2.1
3.9V1: C57.1 C72.1 FB7.1 L2.2 R50.1
+3V1: C40.2 C41.2 C42.2 C43.1 C44.1 C49.2 C50.2 C53.1 C54.1 C65.2 C66.2 C67.2 DA2.6 FB6.2 FB8.2 LCD2.5 LCD2.8 R15.2 R32.1 R33.1 R34.1 R40.2 R46.2 R47.2 R65.1 R67.2 R68.2 S4.3 S4.4 U12.1 U12.24 U12.36 U12.48 U13.3 U13.4 U15.1 U16.2 U17.1 U17.14
+3V3: C2.1 C4.1 C5.1 C12.2 C13.2 C14.2 C15.1 C20.2 C23.2 C24.2 C37.2 C39.2 DA1.6 FB2.2 FB3.2 LCD1.5 LCD1.8 R3.1 R4.2 R13.2 R16.1 R18.2 R19.2 R22.2 R23.2 R25.1 R38.1 S3.3 S3.4 U1.3 U1.4 U3.1 U3.24 U3.36 U3.48 U5.1 U6.2 U8.1 U8.14
ADC1: U8.16
ADC2: U8.15
ADC3: U8.13
ADC4: U17.16
ADC5: U17.15
ADC6: U17.13
AMP+: AMP1.3 R42.1
AMP+1: AMP2.3 R57.1
AMP-: AMP1.4 C34.2 R43.1 R44.2
AMP-1: AMP2.4 C56.2 R58.1 R59.2
BS: C29.1 U4.1
BS1: C61.1 U14.1
CC1: C18.1 D8.K J3.A5 U1.1 U1.14
CC2: C19.1 D6.K J3.B5 U1.10 U1.11
CC3: C46.1 D13.K J1.B5 U13.10 U13.11
CC4: C45.1 D14.K J1.A5 U13.1 U13.14
CS: U8.8
CS1: U17.8
D+: J3.A6 J3.B6 VD1.3
D+1: J1.A6 J1.B6 VD2.3
D-: J3.A7 J3.B7 VD1.1
D-1: J1.A7 J1.B7 VD2.1
DCDC_IN: C33.1 D1.C R20.2 U4.5
DCDC_IN1: C51.1 D15.C R48.2 U14.5
EN: R20.1 U4.4
EN1: R48.1 U14.4
GND: AMP1.2 BUZ1.- C2.2 C3.2 C4.2 C5.2 C6.2 C7.2 C8.1 C9.1 C10.2 C11.1 C12.1 C13.1 C14.1 C15.2 C16.1 C18.2 C19.2 C20.1 C23.1 C24.1 C25.2 C26.2 C27.2 C30.2 C31.1 C32.2 C33.2 C37.1 C39.1 D2.A D5.A D6.A D7.A D8.A D9.A DA1.1 DA1.2 DA1.7 FB4.1 FB4.2 J3.GND J3.GND2 J3.SHLD1 J3.SHLD2 J3.SHLD3 J3.SHLD4 J3.SHLD5 J3.SHLD6 J3.SHLD7 J3.SHLD8 JP1.1 LCD1.7 PAD5.TP PAD6.TP PAD7.TP PAD8.TP Q4.2 R1.1 R8.2 R12.1 R17.1 R43.2 S1.1 S1.2 S2.1 S2.2 S5.1 S5.2 T1.1A1 T1.1B1 U1.8 U1.9 U1.THERMAL U3.8 U3.23 U3.35 U3.47 U3.P$1 U4.2 U5.3 U6.1 U8.5 U8.10 U8.12 VD1.2 ZO1.2 ZO1.4
GND1: AMP2.2 BUZ2.- C28.1 C36.1 C38.1 C40.1 C41.1 C42.1 C43.2 C44.2 C45.2 C46.2 C49.1 C50.1 C51.2 C53.2 C54.2 C55.2 C57.2 C58.2 C59.1 C62.2 C63.2 C64.1 C65.1 C66.1 C67.1 C68.2 C69.2 C70.2 C71.2 D4.A D11.A D12.A D13.A D14.A D16.A DA2.1 DA2.2 DA2.7 FB9.1 FB9.2 J1.GND J1.GND2 J1.SHLD1 J1.SHLD2 J1.SHLD3 J1.SHLD4 J1.SHLD5 J1.SHLD6 J1.SHLD7 J1.SHLD8 JP2.1 LCD2.7 PAD17.TP PAD18.TP PAD19.TP PAD20.TP Q6.2 R29.2 R39.1 R49.1 R58.2 R64.1 S6.1 S6.2 S7.1 S7.2 S8.1 S8.2 T2.1A1 T2.1B1 U12.8 U12.23 U12.35 U12.47 U12.P$1 U13.8 U13.9 U13.THERMAL U14.2 U15.3 U16.1 U17.5 U17.10 U17.12 VD2.2 ZO2.2 ZO2.4
GND2: C108.2 C110.1 C111.2 C114.2 C115.2 C116.1 C117.2 C118.2 C119.2 C120.2 C156.2 R101.1 R111.1 U24.GND U25.4 U26.2 U$7.2 U$7.4 U$14.2
IT_ACCEL_1: U8.11
IT_ACCEL_2: U17.11
LDO_IN: C31.2 FB1.2 U6.3
LDO_IN1: C64.2 FB7.2 U16.3
N$11: R7.2 S3.1 S3.2
N$12: C11.2 FB2.1 U3.9
N$13: C21.2 LCD1.2
N$14: C22.2 LCD1.4
N$15: C25.1 LCD1.13
N$16: LCD1.12 R17.2
N$17: C26.1 LCD1.14
N$18: C35.2 R1.2 R2.2 U4.3
N$19: C22.1 LCD1.3
N$20: C21.1 LCD1.1
N$21: C3.1 R9.2 S1.3 S1.4
N$22: D3.C Q2.1 Q2.2 Q2.3 Q3.1 Q3.2 Q3.3
N$23: D3.A Q2.4 Q3.4 R10.2 R35.1
N$24: C16.2 Q4.3 R35.2
N$25: Q4.1 R11.1
N$26: C17.1 R11.2 R12.2
N$27: C6.1 R14.2 S2.3 S2.4
N$28: R4.1 R5.1 R27.1 VD1.4
N$30: C1.1 DA1.10 R36.1
N$32: C1.2 DA1.9 R37.1
N$35: R41.2 U5.2
N$36: R6.1 R28.1 VD1.6
N$37: FB5.1 U1.2
N$38: AMP1.5 FB3.1
N$39: JP1.2 U3.20
N$48: R26.2 S4.1 S4.2
N$49: C38.2 FB6.1 U12.9
N$50: C47.2 LCD2.2
N$51: C48.2 LCD2.4
N$52: C62.1 LCD2.13
N$55: LCD2.12 R39.2
N$56: C63.1 LCD2.14
N$57: C72.2 R49.2 R50.2 U14.3
N$58: C52.1 DA2.10 R54.1
N$59: C52.2 DA2.9 R55.1
N$60: C48.1 LCD2.3
N$61: C47.1 LCD2.1
N$62: C58.1 R21.2 S6.3 S6.4
N$63: D10.C Q1.1 Q1.2 Q1.3 Q5.1 Q5.2 Q5.3
N$64: D10.A Q1.4 Q5.4 R53.1 R62.2
N$65: C59.2 Q6.3 R53.2
N$66: Q6.1 R63.1
N$67: C60.1 R63.2 R64.2
N$68: R56.2 U15.2
N$69: C68.1 R66.2 S7.3 S7.4
N$70: R15.1 R30.1 R51.1 VD2.4
N$71: R31.1 R52.1 VD2.6
N$72: FB10.1 U13.2
N$73: AMP2.5 FB8.1
N$74: JP2.2 U12.20
NRST: C10.1 R23.1 S5.3 S5.4 U3.7
NRST1: C70.1 R67.1 S8.3 S8.4 U12.7
OSC_IN: C8.2 U3.5 ZO1.3
OSC_IN1: C36.2 U12.5 ZO2.3
OSC_OUT: C9.2 U3.6 ZO1.1
OSC_OUT1: C28.2 U12.6 ZO2.1
OUT: AMP1.1 C34.1 R44.1 R45.2
OUT1: AMP2.1 C56.1 R59.1 R60.2
PA0: U3.10
PA1: U3.11
PA2: U12.38
PA2/ADC1: R56.1 U12.12
PA2/ADC2: R41.1 U3.12
PA3: U12.14
PA3/T2C1: C60.2 U12.13
PA3/T2C4: C17.2 U3.13
PA4: U3.14
PA5: U3.15
PA6: U3.16
PA7: U12.10
PA7/T1CH1N/T3C1: BUZ2.+ U12.17
PA7/T1CH1N/T3C2: BUZ1.+ U3.17
PA8: U12.15
PA8/SCL1: DA2.5 R33.2 U12.29 U13.6 U17.4
PA8/SCL3: DA1.5 R3.2 U1.6 U3.29 U8.4
PA9: U12.11
PA9/T1C1: U12.30
PA9/T1C2: U3.30
PA10: U12.16
PA10/IT_ACCEL_1: U12.31 U17.9
PA10/IT_ACCEL_2: U3.31 U8.9
PA11/USB_DM: R6.2 U3.32
PA11/USB_DM1: R31.2 U12.32
PA12/USB_DP: R5.2 U3.33
PA12/USB_DP1: R30.2 U12.33
PA13/SWDIO: R27.2 U3.34
PA13/SWDIO1: R51.2 U12.34
PA14/SWCLK: R28.2 U3.37
PA14/SWCLK1: R52.2 U12.37
PA15: U3.38
PB0/ADC1: R60.1 U12.18
PB0/ADC8: R45.1 U3.18
PB1: U12.41
PB1/IT_FUSB1: R34.2 U12.19 U13.5
PB1/IT_FUSB302: R16.2 U1.5 U3.19
PB2: U12.25
PB3: U3.39
PB4: U12.21
PB4/SDA1: DA2.4 R32.2 U12.40 U13.7 U17.6
PB4/SDA3: DA1.4 R25.2 U1.7 U3.40 U8.6
PB5: U3.41
PB6: U12.39
PB6/SCL1: LCD1.10 R19.1 U3.42
PB6/SCL2: LCD2.10 R46.1 U12.42
PB7/SDA1: LCD1.11 R18.1 U3.43
PB7/SDA2: LCD2.11 R40.1 U12.43
PB8&BOOT0_S1: R26.1 R29.1 U12.44 U12.45
PB8&BOOT0_S3: R7.1 R8.1 U3.44 U3.45
PB9/S1: R9.1 U3.46
PB9/S2: R21.1 U12.46
PB10: U3.21
PB12: U3.25
PB13/IT_INA1: DA2.3 R65.2 U12.26
PB13/IT_INA226: DA1.3 R38.2 U3.26
PB14/MISO1: U12.27
PB14/MISO2: U3.27
PB15/S1: R66.1 U12.28
PB15/S2: R14.1 U3.28
PC1: U12.2
PC13: U3.2
PC14/OSC32_IN: U3.3
PC14/OSC32_IN1: U12.3
PC15/OSC32_OUT: U3.4
PC15/OSC32_OUT1: U12.4
PGND: IC1.3
PGND1: CP1.1A CP1.1B PAD9.TP PAD10.TP PAD11.TP PAD12.TP TP1.P$1
PGND2: CP2.1A CP2.1B PAD21.TP PAD22.TP PAD23.TP PAD24.TP TP2.P$1
RES_3.3V: C7.1 LCD1.9 R22.1
RES_3.3V1: C69.1 LCD2.9 R47.1
S$6: C113.2 U$4.2 USB-C.SHLD3 USB-C.SHLD4
S$9: C112.1 S13.2 USB-C.GND1 USB-C.SHLD1 USB-C.SHLD2
S$19: IC1.9
SAO/SDO/ADDR: U8.7
SAO/SDO/ADDR1: U17.7
SW: C29.2 D7.C L1.1 U4.6
SW1: C61.2 D4.C L2.1 U14.6
T12+: C27.1 D9.C PAD1.TP PAD2.TP PAD3.TP PAD4.TP Q3.5 Q3.6 Q3.7 Q3.8 Q3.9 R13.1 R42.2 T1.1A T1.1B
T12+1: C55.1 D16.C PAD13.TP PAD14.TP PAD15.TP PAD16.TP Q1.5 Q1.6 Q1.7 Q1.8 Q1.9 R57.2 R68.1 T2.1A T2.1B
TP: U26.THERM
VBREF: LCD1.6
VBREF1: LCD2.6
VBUS-C: D1.A FB5.2 Q2.5 Q2.6 Q2.7 Q2.8 Q2.9 R10.1 R24.1 R37.2
VBUS-C1: D15.A FB10.2 Q5.5 Q5.6 Q5.7 Q5.8 Q5.9 R55.2 R61.1 R62.1
VCAP1: C32.1 U3.22
VCAP2: C71.1 U12.22
VDD: IC2.11 IC2.28 IC2.50 IC2.75 IC2.100
VDDA: IC2.22
VSS: IC2.10 IC2.27 IC2.49 IC2.74 IC2.99
VSSA: IC2.19
VUSB_IN: D2.C D5.C DA1.8 J3.VBUS1 J3.VBUS2 R24.2 R36.2
VUSB_IN1: D11.C D12.C DA2.8 J1.VBUS1 J1.VBUS2 R54.2 R61.2